# EAGLE board ranback_top (EAGLE 9.6.2)
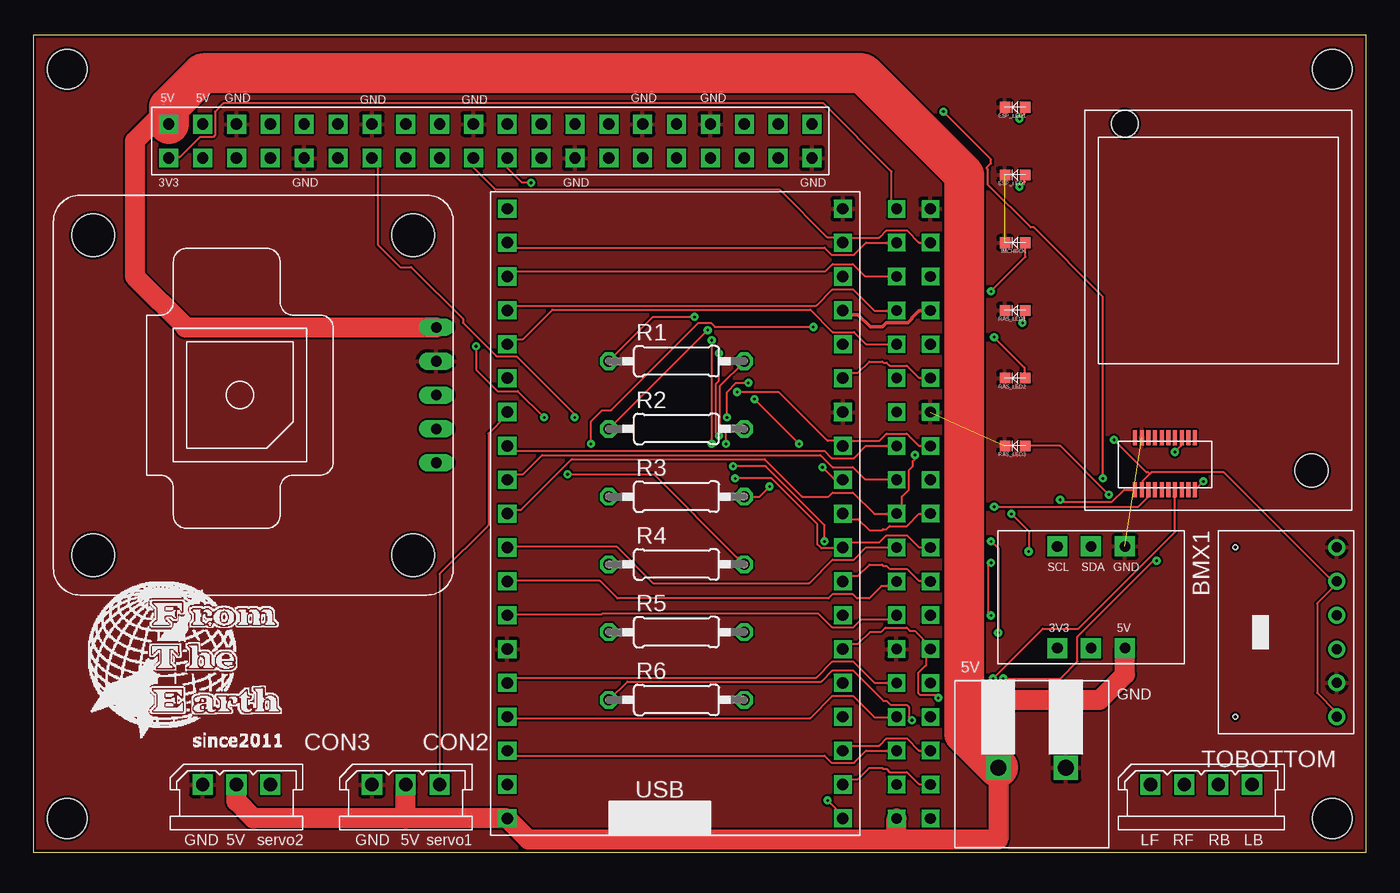
[diagram p0: board, top side]
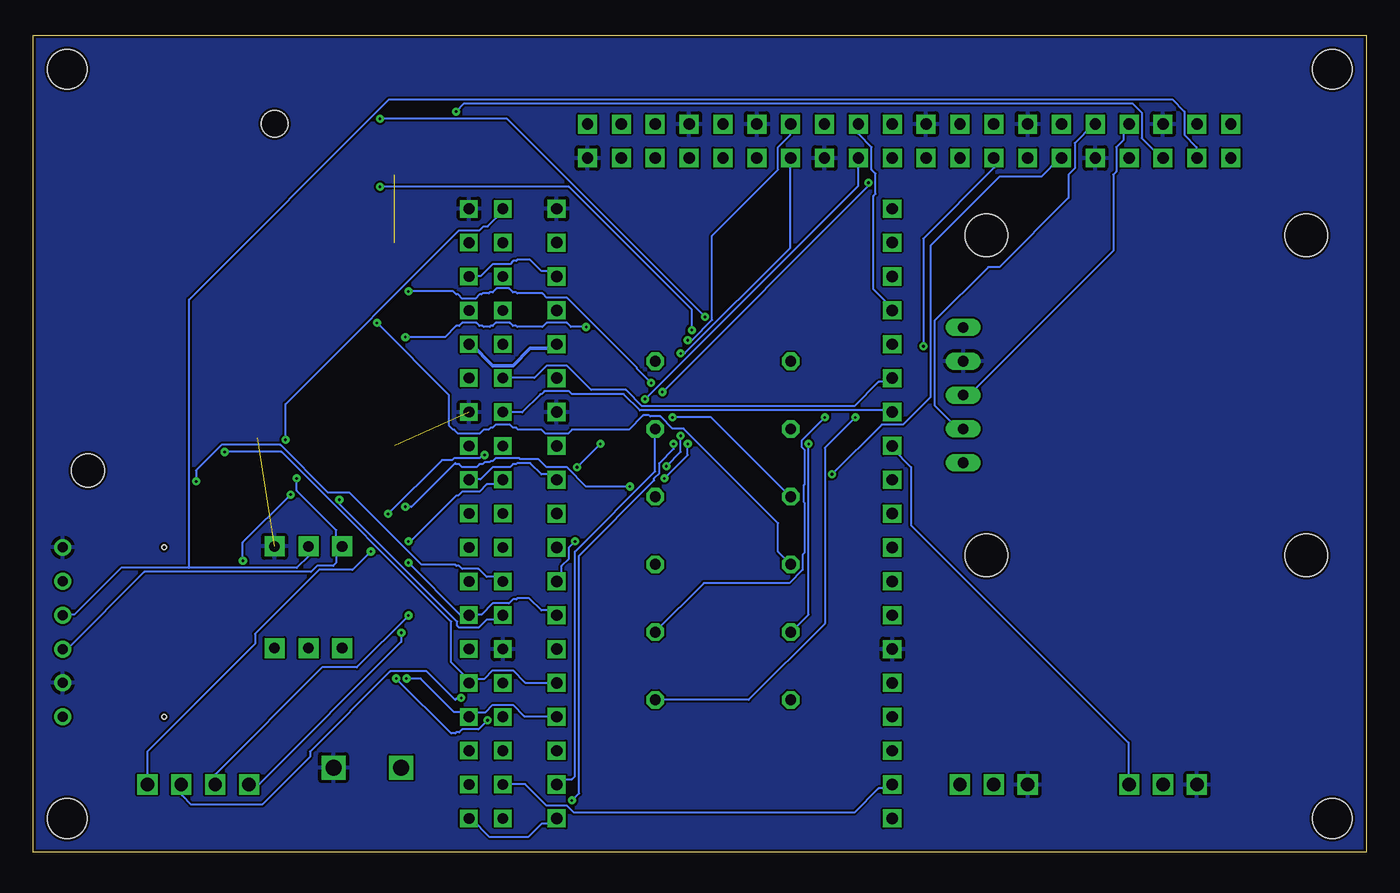
[diagram p1: board, bottom side, seen from below]

Size 100 x 61.27 mm. Coordinates in mm from the lower left corner, seen from the top.
Outline: 0,0 100,0 100,61.27 0,61.27 0,0
Copper layers (1*16): Top 0.035mm / dielectric 1.5mm / Bottom 0.035mm
Design rules "PCBGoGo": minimum track width 6mil, minimum drill 0.2mm, track to track 6mil, track to pad 6mil, pad to pad 6mil, via to via 6mil, smd to smd 6mil, copper to edge 0.2mm, drill to drill 6mil, minimum pad ring 10mil, minimum via ring 8mil, stop-mask expansion 4mil, vias tented up to drill 0mil, thermal gap 10mil
Net classes: 1 esp: width 0.254 mm, drill 0.127 mm, clearance 0.025 mm; 2 GND_+12V: width 0.305 mm
Holes 3 mm at 2.54,2.54 2.54,58.73 97.46,58.73 97.46,2.54

## Footprints (pad centres in the part's own frame; a part is rotated, then mirrored left to right if it is on the bottom)
BMX055 = drill 0.8 pad 1.5 square: 3V3 8.81,-9.53; GND 1.19,-4.46; SCL 1.19,-9.53; SDA 1.19,-7; VCC 8.81,-4.46; VCCIO 8.81,-7
2.5_MINI-SPOX_3PIN = drill 1 square: 1 -1.27,0; 2 1.27,0; 3 3.81,0
OSXX1608C1A = smd 0.8 x 0.8: AN -0.75,0; CT 0.75,0
AE-GYSFDMAXB = drill 0.8 long: P1 13.716,5.08; P2 13.716,2.54; P3 13.716,0; P4 13.716,-2.54; P5 13.716,-5.08 | hole 3.2: -12,12; 12,12; 12,-12; -12,-12
IM920C = smd 0.3 x 1.1: $P1 -1.75,-13.45; $P2 -1.75,-9.55; $P3 -2.25,-13.45; $P4 -2.25,-9.55; $P5 -2.75,-13.45; $P6 -2.75,-9.55; $P7 -3.25,-13.45; $P8 -3.25,-9.55; $P9 -3.75,-13.45; $P10 -3.75,-9.55; $P11 -4.25,-13.45; $P12 -4.25,-9.55; $P13 -4.75,-13.45; $P14 -4.75,-9.55; $P15 -5.25,-13.45; $P16 -5.25,-9.55; $P17 -5.75,-13.45; $P18 -5.75,-9.55; $P19 -6.25,-13.45; $P20 -6.25,-9.55 | hole 2.5: 7,-12 | hole 2: -7,14
19_2.54 = drill 0.8 pad 1.27 square: 1 0,12.7; 2 0,10.16; 3 0,7.62; 4 0,5.08; 5 0,2.54; 6 0,0; 7 0,-2.54; 8 0,-5.08; 9 0,-7.62; 10 0,-10.16; 11 0,-12.7; 12 0,-15.24; 13 0,-17.78; 14 0,-20.32; 15 0,-22.86; 16 0,-25.4; 17 0,-27.94; 18 0,-30.48; 19 0,-33.02
0207/10 = drill 0.813 octagon: 1 -5.08,0; 2 5.08,0
RASPBERRYPI4B = drill 0.85 pad 1.422 square: 3V3_1 -2.54,-2.54; 3V3_2 -2.54,-22.86; 5V_1 0,-2.54; 5V_2 0,-5.08; GND_1 0,-7.62; GND_2 0,-17.78; GND_3 0,-25.4; GND_4 0,-38.1; GND_5 0,-43.18; GND_6 -2.54,-12.7; GND_7 -2.54,-33.02; GND_8 -2.54,-50.8; GPIO0 -2.54,-35.56; GPIO1 0,-35.56; GPIO2 -2.54,-5.08; GPIO3 -2.54,-7.62; GPIO4 -2.54,-10.16; GPIO5 -2.54,-38.1; GPIO6 -2.54,-40.64; GPIO7 0,-33.02; GPIO8 0,-30.48; GPIO9 -2.54,-27.94; GPIO10 -2.54,-25.4; GPIO11 -2.54,-30.48; GPIO12 0,-40.64; GPIO13 -2.54,-43.18; GPIO14 0,-10.16; GPIO15 0,-12.7; GPIO16 0,-45.72; GPIO17 -2.54,-15.24; GPIO18 0,-15.24; GPIO19 -2.54,-45.72; GPIO20 0,-48.26; GPIO21 0,-50.8; GPIO22 -2.54,-20.32; GPIO23 0,-20.32; GPIO24 0,-22.86; GPIO25 0,-27.94; GPIO26 -2.54,-48.26; GPIO27 -2.54,-17.78
TERMINAL_SLOPED_2PIN = drill 1.2 square: 1 -2.54,0; 2 2.54,0
2.5_MINI-SPOX_4PIN = drill 1 square: P$1 -1.27,0; P$2 6.35,0; P$3 1.27,0; P$4 3.81,0
ESP32 = drill 0.85 square: 3.3V 1.27,46.99; 5V 1.27,1.27; EN 1.27,44.45; GND1 1.27,13.97; GND2 26.44,46.99; GND3 26.44,31.75; GPIO0 26.44,13.97; GPIO2 26.44,11.43; GPIO4 26.44,16.51; GPIO5 26.44,24.13; GPIO6 26.44,1.27; GPIO7 26.44,3.81; GPIO8 26.44,6.35; GPIO9 1.27,8.89; GPIO10 1.27,6.35; GPIO11 1.27,3.81; GPIO12 1.27,16.51; GPIO13 1.27,11.43; GPIO14 1.27,19.05; GPIO15 26.44,8.89; GPIO16 26.44,19.05; GPIO17 26.44,21.59; GPIO18 26.44,26.67; GPIO19 26.44,29.21; GPIO21 26.44,34.29; GPIO22 26.44,41.91; GPIO23 26.44,44.45; GPIO25 1.27,26.67; GPIO26 1.27,24.13; GPIO27 1.27,21.59; GPIO32 1.27,31.75; GPIO33 1.27,29.21; GPIO34 1.27,36.83; GPIO35 1.27,34.29; GPIO36 1.27,41.91; GPIO39 1.27,39.37; RX 26.44,36.83; TX 26.44,39.37
GY-BMP280-FOOTPRINT = drill 0.75 pad 1.27: CSB 11.43,0; GND 3.81,0; SCK 6.35,0; SDI 8.89,0; SDO 13.97,0; VCC 1.27,0 | hole 0.35: 1.27,7.62; 13.97,7.62

## Placement (x,y rotation side)
BMX1  BMX055  [BMX055]  86.36,24.13 270 top
CON2  [2.5_MINI-SPOX_3PIN]  26.67,5.08 0 top
CON3  [2.5_MINI-SPOX_3PIN]  13.97,5.08 0 top
ESP_LED1  OSXX1608C1A  [OSXX1608C1A]  73.66,55.88 180 top
ESP_LED2  OSXX1608C1A  [OSXX1608C1A]  73.66,50.8 180 top
GPS  AE-GYSFDMAXB  [AE-GYSFDMAXB]  16.51,34.29 0 top
IM  IM920C  [IM920C]  88.9,40.64 0 top
IMCHECK  OSXX1608C1A  [OSXX1608C1A]  73.66,45.72 180 top
PIN_L  [19_2.54]  64.77,35.56 0 top
PIN_R  [19_2.54]  67.31,35.56 0 top
R1  80R  [0207/10]  48.26,36.83 0 top
R2  80R  [0207/10]  48.26,31.75 0 top
R3  80R  [0207/10]  48.26,26.67 0 top
R4  80R  [0207/10]  48.26,21.59 0 top
R5  80R  [0207/10]  48.26,16.51 0 top
R6  80R  [0207/10]  48.26,11.43 0 top
RAS_LED1  OSXX1608C1A  [OSXX1608C1A]  73.66,40.64 180 top
RAS_LED2  OSXX1608C1A  [OSXX1608C1A]  73.66,35.56 180 top
RAS_LED3  OSXX1608C1A  [OSXX1608C1A]  73.66,30.48 180 top
RASPBERRYPI_4B  [RASPBERRYPI4B]  7.62,54.61 90 top
TM5  [TERMINAL_SLOPED_2PIN]  74.93,6.35 0 top
TOBOTTOM  [2.5_MINI-SPOX_4PIN]  85.09,5.08 0 top
U$1  [LOGO]  3.56,6.48 0 top
U$2  ESP32  [ESP32]  34.29,1.27 0 top
U$9  GY-BPM280  [GY-BMP280-FOOTPRINT]  97.79,8.89 90 top

## Library data of the parts
BMX1 = BMX055
CON2 CON3 TOBOTTOM = Connector
ESP_LED1 ESP_LED2 IMCHECK RAS_LED1-RAS_LED3 = ChipLED
GPS = AE-GYSFDMAXB
IM = IM920
PIN_L PIN_R = JumperPins
R1-R6 = rcl; SPICEPREFIX: R
RASPBERRYPI_4B = RASPBERRYPI4B
TM5 = TerminalBrock
U$1 = logo
U$2 = ESP32_dev
U$9 = BMP280

## Nets
3V3: BMX1.3V3
+3V3: IM.$P17 PIN_L.1 RASPBERRYPI_4B.3V3_1 U$9.CSB U$9.VCC
+5V: BMX1.VCC CON2.2 CON3.2 GPS.P1 PIN_L.19 RASPBERRYPI_4B.5V_1 TM5.1 U$2.5V
BB_SCL: BMX1.SCL RASPBERRYPI_4B.GPIO3 U$9.SCK
BB_SDA: BMX1.SDA RASPBERRYPI_4B.GPIO2 U$9.SDI
EN: PIN_L.2 U$2.EN
GND [GND_+12V]: BMX1.GND CON2.1 CON3.1 ESP_LED1.CT ESP_LED2.CT GPS.P2 IM.$P18 IMCHECK.CT PIN_L.14 PIN_R.1 PIN_R.7 RAS_LED1.CT RAS_LED2.CT RAS_LED3.CT RASPBERRYPI_4B.GND_1 RASPBERRYPI_4B.GND_2 RASPBERRYPI_4B.GND_3 RASPBERRYPI_4B.GND_4 RASPBERRYPI_4B.GND_5 RASPBERRYPI_4B.GND_6 RASPBERRYPI_4B.GND_7 RASPBERRYPI_4B.GND_8 TM5.2 U$2.GND1 U$2.GND2 U$2.GND3 U$9.GND U$9.SDO
GPS_RX: GPS.P3 RASPBERRYPI_4B.GPIO14
GPS_TX: GPS.P4 RASPBERRYPI_4B.GPIO15
IM_BUSY: IM.$P1 PIN_L.12 U$2.GPIO14
IM_RESET: IM.$P19 PIN_L.13 U$2.GPIO12
IM_RX: IM.$P6 PIN_R.15 U$2.GPIO2
IM_TX: IM.$P7 PIN_R.16 U$2.GPIO15
IO5: PIN_R.10 U$2.GPIO5
IO8: PIN_R.17 U$2.GPIO8
IO9: PIN_L.16 U$2.GPIO9
IO10: PIN_L.17 U$2.GPIO10
IO11: PIN_L.18 U$2.GPIO11
IO13: PIN_L.15 U$2.GPIO13
IO27: PIN_L.11 U$2.GPIO27
IO34: PIN_L.5 U$2.GPIO34
IO35: PIN_L.6 U$2.GPIO35
LED1: PIN_R.19 R1.2 U$2.GPIO6
LED2: PIN_R.18 R2.2 U$2.GPIO7
LED3: IM.$P15 R3.2
LED4: R4.2 RASPBERRYPI_4B.GPIO17
LED5: R5.2 RASPBERRYPI_4B.GPIO27
LED6: R6.2 RASPBERRYPI_4B.GPIO22
MD_LB: PIN_L.10 TOBOTTOM.P$2 U$2.GPIO26
MD_LF: PIN_L.9 TOBOTTOM.P$1 U$2.GPIO25
MD_RB: PIN_R.14 TOBOTTOM.P$4 U$2.GPIO0
MD_RF: PIN_R.13 TOBOTTOM.P$3 U$2.GPIO4
N$1: ESP_LED1.AN R1.1
N$2: ESP_LED2.AN R2.1
N$3: IMCHECK.AN R3.1
N$4: R4.1 RAS_LED1.AN
N$5: R5.1 RAS_LED2.AN
N$6: R6.1 RAS_LED3.AN
RP_MISO: PIN_R.8 RASPBERRYPI_4B.GPIO9 U$2.GPIO19
RP_MOSI: PIN_R.2 RASPBERRYPI_4B.GPIO10 U$2.GPIO23
RP_RX: PIN_R.11 RASPBERRYPI_4B.GPIO1 U$2.GPIO17
RP_SCK: PIN_R.9 RASPBERRYPI_4B.GPIO11 U$2.GPIO18
RP_SS: PIN_L.4 RASPBERRYPI_4B.GPIO8 U$2.GPIO39
RP_TX: PIN_R.12 RASPBERRYPI_4B.GPIO0 U$2.GPIO16
RXD [esp]: PIN_R.4 U$2.TX
SCL: PIN_R.3 U$2.GPIO22
SDA: PIN_R.6 U$2.GPIO21
SENSOR_VP: PIN_L.3 U$2.GPIO36
SERVO1: CON2.3 PIN_L.7 U$2.GPIO32
SERVO2: CON3.3 PIN_L.8 U$2.GPIO33
TXD [esp]: PIN_R.5 U$2.RX
VCCIO: BMX1.VCCIO

## Tracks (layer width: path | path; a pad name or v marks a point on that pad's centre or on a via)
+3V3  (via drill 0.2)
  Top 0.152: 83.78,28.38 83.9,28.5 89.31,28.5 97.46,20.34 | 83.78,28.38 83.21,27.81 83.21,27.2 IM.$P17 | 97.46,20.34 97.77,20.34 U$9.CSB 97.46,20.34 | 97.46,20.34 97.46,19.81 96.32,18.67 96.32,11.96 97.77,10.52 97.77,10.21 U$9.VCC | v81.08,30.94 83.52,28.5 83.67,28.5 83.78,28.38 | RASPBERRYPI_4B.3V3_1 10.21,52.12 10.97,52.12 12.5,53.65 13.49,53.65 13.64,53.8 13.64,55.55 14.25,56.16 59.28,56.16 64.39,51.05 64.39,48.69 64.77,48.31 PIN_L.1
  Bottom 0.152: PIN_L.1 64.77,48.08 65.91,46.94 66.22,46.94 66.52,46.63 68.05,46.63 81.08,33.6 v81.08,30.94
+5V
  Top 1.5: 10.16,55.88 7.62,53.34 7.62,43.18 11.43,39.37 GPS.P1 | BMX1.VCC 81.9,13.32 80.01,11.43 72.39,11.43 TM5.1 72.39,0.95 64.77,0.95 | 64.77,0.95 37.15,0.95 U$2.5V 27.94,2.54 | CON3.2 15.24,3.81 16.51,2.54 27.94,2.54 | 27.94,2.54 CON2.2 | 64.77,0.95 PIN_L.19
  Top 3: TM5.1 69.85,8.89 69.85,50.8 62.23,58.42 12.7,58.42 10.16,55.88 RASPBERRYPI_4B.5V_1
BB_SCL  (via drill 0.2)
  Top 0.152: v68.28,55.55 71.86,51.97 71.86,51.66 71.55,51.36 71.55,51.28 71.63,51.21 71.63,50.06 74.83,46.86 75.06,46.86 80.24,41.68 v80.24,28.04
  Bottom 0.152: U$9.SCK 97.46,15.24 91.67,21.03 79.17,21.03 78.72,21.49 77.5,21.49 77.27,21.72 77.27,22.55 76.89,22.94 BMX1.SCL 76.89,23.01 77.27,23.39 77.27,24.16 80.24,27.13 v80.24,28.04 | v68.28,55.55 67.67,56.16 17.53,56.16 16.84,55.47 16.84,53.57 15.39,52.12 15.24,52.12 RASPBERRYPI_4B.GPIO3
BB_SDA
  Bottom 0.152: 88.32,21.34 80.24,21.34 79.32,22.25 79.32,22.94 BMX1.SDA | 88.32,21.34 93.42,21.34 96.93,17.83 97.77,17.83 U$9.SDI | 88.32,21.34 88.32,41.45 73.3,56.46 14.55,56.46 13.64,55.55 13.64,53.8 12.72,52.88 12.72,52.12 RASPBERRYPI_4B.GPIO2
EN
  Top 0.152: PIN_L.2 62.48,45.72 61.57,44.81 59.89,44.81 59.36,45.34 35.97,45.34 35.59,45.72 U$2.EN
GND  (3 unrouted)
  pour Top: -1.27,62.23 101.6,62.23 101.6,-2.54 -1.27,-2.54
  pour Bottom: -1.27,62.23 101.6,62.23 101.6,-1.27 -1.27,-1.27
GPS_RX
  Bottom 0.152: GPS.P3 29.79,34.29 18.97,45.11 18.97,50.83 18.75,51.05 18.75,52.88 18.21,53.42 18.21,54.18 RASPBERRYPI_4B.GPIO14
GPS_TX
  Bottom 0.152: GPS.P4 30.25,31.77 30.63,31.77 32.38,33.53 32.38,39.85 28.35,43.89 27.51,43.89 22.33,49.07 22.33,50.83 21.87,51.28 21.87,53.19 20.5,54.56 20.34,54.56 RASPBERRYPI_4B.GPIO15
IM_BUSY  (via drill 0.2)
  Top 0.152: v87.78,27.81 87.17,27.2 IM.$P1 | U$2.GPIO14 35.59,20.34 42.52,20.34 43.81,19.05 59.66,19.05 59.97,19.36 61.49,19.36 61.8,19.05 62.71,19.05 63.63,19.96 64.47,19.96 64.77,20.27 PIN_L.12
  Bottom 0.152: v87.78,27.81 87.78,28.65 85.88,30.56 81.46,30.56 77.88,26.98 76.28,26.98 70.87,21.57 68.35,21.57 68.28,21.49 68.05,21.49 67.82,21.26 66.6,21.26 65.99,20.65 65.08,20.65 64.77,20.34 PIN_L.12
IM_RESET  (via drill 0.2)
  Top 0.152: v77.04,26.44 77.19,26.29 80.92,26.29 81.84,27.2 82.6,27.2 IM.$P19 | U$2.GPIO12 35.59,17.83 42.6,17.83 42.67,17.91 58.9,17.91 59.97,16.84 61.49,16.84 62.1,17.45 64.47,17.45 64.77,17.75 PIN_L.13
  Bottom 0.152: v77.04,26.44 77.04,26.14 68.2,17.3 68.2,16.99 68.05,16.84 66.6,16.84 65.99,17.45 65.08,17.45 64.77,17.75 PIN_L.13
IM_RX  (via drill 0.2)
  Top 0.152: v85.65,30.02 86.11,30.48 86.11,31.09 IM.$P6
  Bottom 0.152: v85.65,30.02 81.38,30.02 68.66,17.3 68.66,14.25 67.36,12.95 67.36,12.72 PIN_R.15 67.36,13.03 66.14,13.03 65.53,13.64 64.01,13.64 63.09,12.72 60.73,12.72 U$2.GPIO2
IM_TX  (via drill 0.2)
  Top 0.152: v72.01,13.03 75.74,16.76 78.41,16.76 85.65,24 85.65,27.13 IM.$P7
  Bottom 0.152: v72.01,13.03 70.94,13.03 68.43,10.52 67.67,10.52 PIN_R.16 67.28,10.21 66.98,10.52 66.06,10.52 65.53,11.05 64.01,11.05 63.17,10.21 60.73,10.21 U$2.GPIO15
IO5
  Top 0.152: PIN_R.10 67.28,25.38 66.45,25.38 65.53,24.46 64.24,24.46 64.01,24.23 63.78,24.23 63.7,24.16 62.71,24.16 61.87,24.99 61.11,24.99 60.73,25.38 U$2.GPIO5
IO8
  Top 0.152: PIN_R.17 66.45,7.62 65.53,8.53 64.01,8.53 63.48,8 61.11,8 U$2.GPIO8
IO9
  Top 0.152: U$2.GPIO9 35.66,10.06 58.29,10.06 59.97,11.73 61.49,11.73 63.09,10.13 64.77,10.13 PIN_L.16
IO10
  Top 0.152: PIN_L.17 62.48,7.62 61.57,6.71 59.89,6.71 59.36,7.24 35.97,7.24 35.59,7.62 U$2.GPIO10
IO11
  Bottom 0.152: PIN_L.18 64.77,5.11 63.09,5.11 61.49,3.5 59.97,3.5 59.44,2.97 38.41,2.97 36.58,4.8 35.81,4.8 35.59,5.03 U$2.GPIO11
IO13
  Top 0.152: U$2.GPIO13 35.97,13.11 58.75,13.11 59.97,14.33 61.49,14.33 63.09,12.72 64.77,12.72 PIN_L.15
IO27
  Top 0.152: PIN_L.11 62.48,22.86 61.57,21.95 59.97,21.95 58.22,20.19 46.48,20.19 43.74,22.94 35.66,22.94 35.59,22.86 U$2.GPIO27
IO34
  Top 0.152: PIN_L.5 62.48,38.1 61.57,39.01 59.97,39.01 58.29,40.69 38.94,40.69 36.73,38.48 35.97,38.48 35.59,38.1 U$2.GPIO34
IO35
  Bottom 0.152: PIN_L.6 64.77,35.59 62.41,35.59 61.49,36.5 59.97,36.5 58.14,34.67 55.55,34.67 54.33,33.45 38.41,33.45 36.58,35.28 35.81,35.28 35.59,35.51 U$2.GPIO35
LED1  (via drill 0.2)
  Top 0.152: v51.97,30.63 51.97,31.47 51.51,31.93 51.51,34.98 53.34,36.8 R1.2 | v59.59,3.89 60.66,2.82 60.66,2.59 U$2.GPIO6
  Bottom 0.152: PIN_R.19 67.28,2.52 67.13,2.52 65.76,1.14 62.87,1.14 61.87,2.13 61.11,2.13 60.73,2.52 U$2.GPIO6 | v51.97,30.63 51.97,30.25 53.03,29.18 53.03,28.42 53.42,28.04 53.42,27.89 59.05,22.25 59.05,4.42 v59.59,3.89
LED2
  Top 0.152: PIN_R.18 67.28,5.11 66.45,5.11 65.53,6.02 64.24,6.02 64.01,6.25 63.78,6.25 63.7,6.33 62.71,6.33 61.87,5.49 61.11,5.49 60.73,5.11 U$2.GPIO7
  Bottom 0.152: R2.2 53.34,28.57 59.36,22.55 59.36,5.71 59.59,5.49 60.27,5.49 60.66,5.11 U$2.GPIO7
LED3  (via drill 0.2)
  Top 0.152: v72.08,25.91 82.91,25.91 83.59,26.59 83.59,27.13 IM.$P15 | v55.24,27.43 54.48,26.67 R3.2
  Bottom 0.152: v72.08,25.91 71.63,25.91 68.35,29.18 68.28,29.11 68.05,29.11 67.82,28.88 66.75,28.88 66.52,29.11 66.29,29.11 66.14,29.26 65.76,29.26 65.68,29.34 65.53,29.34 65.3,29.57 63.55,29.57 63.48,29.49 62.1,29.49 61.49,28.88 59.97,28.88 58.52,27.43 v55.24,27.43
LED4  (via drill 0.2)
  Top 0.152: v40.08,28.35 46.56,28.35 52.81,22.1 52.88,22.1 53.34,21.64 R4.2
  Bottom 0.152: v40.08,28.35 36.35,32.08 34.75,32.08 32.69,34.14 32.69,45.49 27.51,50.67 24.38,50.67 23.01,52.05 22.86,52.05 RASPBERRYPI_4B.GPIO17
LED5  (via drill 0.2)
  Top 0.152: v40.62,32.61 40.62,32.84 36.27,37.19 34.75,37.19 32.23,39.7 32.23,40.01 28.35,43.89 27.51,43.89 25.83,45.57 25.83,51.66 25.45,52.05 RASPBERRYPI_4B.GPIO27
  Bottom 0.152: v40.62,32.61 42.37,30.86 42.37,30.4 42.14,30.18 42.14,27.58 42.22,27.51 42.22,26.29 42.14,26.21 42.14,22.48 42.29,22.33 42.29,21.18 43.28,20.19 49.68,20.19 53.34,16.54 R5.2
LED6  (via drill 0.2)
  Top 0.152: v38.33,32.61 36.35,34.59 34.82,34.59 33.22,36.2 v33.22,37.95
  Bottom 0.152: R6.2 46.33,11.43 40.62,17.14 40.62,30.33 v38.33,32.61 | v33.22,37.95 33.22,46.02 27.89,51.36 27.89,52.05 RASPBERRYPI_4B.GPIO22
MD_LB  (via drill 0.2)
  Top 0.152: U$2.GPIO26 35.59,25.45 35.81,25.68 36.58,25.68 40.39,29.49 54.86,29.49 57.68,26.67 59.66,26.67 59.97,26.98 61.49,26.98 63.09,25.38 64.77,25.38 PIN_L.10 64.77,25.45 65.15,25.83 65.15,26.67 65.68,27.2 65.68,28.65 65.99,28.96 65.99,29.34 66.14,29.49 v66.14,29.79 | v74.68,22.55 74.68,24.08 v73.38,25.38
  Bottom 0.152: TOBOTTOM.P$2 91.44,7.54 83.36,15.62 83.36,16.38 78.56,21.18 76.05,21.18 v74.68,22.55 | v73.38,25.38 69.34,29.41 68.58,29.41 68.43,29.57 66.52,29.57 66.29,29.79 v66.14,29.79
MD_LF  (via drill 0.2)
  Top 0.152: U$2.GPIO25 35.97,28.35 36.73,28.35 38.18,29.79 59.05,29.79 59.97,28.88 61.49,28.88 62.41,27.96 64.77,27.96 PIN_L.9 | v72.39,16.46 72.39,22.78 v71.86,23.32
  Bottom 0.152: v72.39,16.46 72.39,15.77 83.06,5.11 83.82,5.11 TOBOTTOM.P$1 | v71.86,23.32 71.7,23.32 68.28,26.75 68.12,26.75 67.82,27.05 66.52,27.05 65.99,27.58 65.08,27.58 64.77,27.89 PIN_L.9
MD_RB  (via drill 0.2)
  Top 0.152: 67.28,15.24 67.28,15.47 66.14,16.61 65.76,16.61 65.53,16.84 63.93,16.84 63.63,16.54 62.79,16.54 61.87,15.62 61.11,15.62 U$2.GPIO0 | v67.89,11.58 67.67,11.81 66.52,11.81 66.37,11.96 66.37,13.41 66.98,14.02 66.98,14.94 67.28,15.24 | 67.28,15.24 PIN_R.14
  Bottom 0.152: v67.89,11.58 67.97,11.51 68.28,11.51 68.35,11.43 70.48,13.56 73.23,13.56 79.25,7.54 79.25,7.16 82.83,3.58 88.16,3.58 88.85,4.27 88.85,5.03 TOBOTTOM.P$4
MD_RF  (via drill 0.2)
  Top 0.152: v71.86,17.75 71.63,17.98 71.63,21.49 v71.86,21.72
  Bottom 0.152: U$2.GPIO4 60.73,17.83 61.04,18.14 61.87,18.14 62.79,19.05 63.7,19.05 63.78,18.97 64.01,18.97 64.31,18.67 65.53,18.67 66.37,17.83 67.28,17.83 PIN_R.13 67.36,17.75 67.89,17.75 v71.86,21.72 | v71.86,17.75 75.74,13.87 78.33,13.87 86.33,5.87 86.33,5.11 TOBOTTOM.P$3
N$1  (via drill 0.2)
  Top 0.152: v73.99,55.02 74.37,55.4 74.37,55.85 ESP_LED1.AN | v49.61,40.16 46.48,40.16 43.2,36.88 R1.1
  Bottom 0.152: v73.99,55.02 64.47,55.02 v49.61,40.16
N$2  (via drill 0.2)
  Top 0.152: v73.99,49.91 74.37,50.29 74.37,50.75 ESP_LED2.AN | R2.1 v50.6,39.17
  Bottom 0.152: v73.99,49.91 59.82,49.91 50.6,40.69 v50.6,39.17
N$3  (via drill 0.2)
  Top 0.152: v71.86,42.06 74.45,44.65 74.45,45.72 IMCHECK.AN | v53.65,35.2 52.73,35.2 52.05,34.52 v52.05,32.61
  Bottom 0.152: v71.86,42.06 68.5,42.06 68.28,41.83 68.12,41.83 67.82,41.53 66.83,41.53 66.52,41.83 66.37,41.83 66.29,41.91 65.84,41.91 65.76,41.99 65.53,41.99 65.23,42.29 64.31,42.29 64.01,41.99 63.78,41.99 63.7,41.91 61.8,41.91 61.49,41.6 59.97,41.6 54.71,36.35 54.71,36.27 v53.65,35.2 | v52.05,32.61 49.15,32.61 43.2,26.67 R3.1
N$4  (via drill 0.2)
  Top 0.152: v74.22,39.7 74.37,39.85 74.37,40.62 RAS_LED1.AN
  Bottom 0.152: v74.22,39.7 68.81,34.29 68.81,32 68.5,31.7 68.43,31.7 68.12,31.39 66.52,31.39 66.22,31.7 65.84,31.7 65.68,31.85 65.53,31.85 65.3,32.08 64.24,32.08 64.01,31.85 63.78,31.85 63.63,31.7 61.87,31.7 61.57,31.39 59.89,31.39 59.59,31.7 55.32,31.7 54.25,32.77 53.8,32.77 53.72,32.69 52.96,32.69 52.05,31.77 51.21,31.77 44.12,24.69 44.12,22.55 43.2,21.64 R4.1
N$5  (via drill 0.2)
  Top 0.152: v72.08,38.63 74.37,36.35 74.37,35.59 RAS_LED2.AN | v58.52,39.4 51.13,39.4 50.83,39.7 49.91,39.7 43.36,33.15 42.67,33.15 41.83,32.31 v41.83,30.63
  Bottom 0.152: v72.08,38.63 69.11,38.63 68.28,39.47 68.05,39.47 67.82,39.7 66.75,39.7 66.52,39.47 66.29,39.47 66.22,39.4 65.76,39.4 65.68,39.47 65.53,39.47 65.3,39.7 64.24,39.7 64.01,39.47 63.78,39.47 63.7,39.4 61.8,39.4 61.49,39.7 59.97,39.7 59.66,39.4 v58.52,39.4 | v41.83,30.63 41.83,17.83 43.13,16.54 R5.1
N$6  (via drill 0.2)
  Top 0.152: RAS_LED3.AN 77.04,30.48 v80.7,26.82 | v84.28,21.87 84.05,21.87 78.33,16.15 78.33,14.33 77.04,13.03 v72.77,13.03 | v65.91,9.91 65.68,10.13 65.68,10.9 65.53,11.05 64.31,11.05 64.01,11.35 63.78,11.35 61.49,13.64 59.97,13.64 59.13,12.8 44.58,12.8 43.2,11.43 R6.1
  Bottom 0.152: v80.7,26.82 84.28,23.24 v84.28,21.87 | v72.77,13.03 68.66,8.91 68.35,8.91 68.28,8.99 68.05,8.99 67.82,9.22 66.6,9.22 v65.91,9.91
RP_MISO  (via drill 0.2)
  Top 0.152: PIN_R.8 66.45,30.48 65.53,31.39 64.01,31.39 63.48,30.86 61.11,30.86 U$2.GPIO19 60.66,30.48 60.27,30.86 59.59,30.86 55.93,34.52 v52.81,34.52 | v37.34,50.22 36.65,50.22 35.59,51.28 35.59,52.05 RASPBERRYPI_4B.GPIO9
  Bottom 0.152: v37.34,50.22 37.34,49.99 v52.81,34.52
RP_MOSI
  Top 0.152: PIN_R.2 66.45,45.72 65.53,46.63 64.01,46.63 63.48,46.1 61.11,46.1 U$2.GPIO23 60.66,45.72 60.27,46.1 59.59,46.1 56.01,49.68 34.67,49.68 33.07,51.28 33.07,52.05 RASPBERRYPI_4B.GPIO10
RP_RX  (via drill 0.2)
  Top 0.152: PIN_R.11 66.45,22.86 65.53,23.77 64.01,23.77 63.48,23.24 61.11,23.24 U$2.GPIO17 60.66,22.86 60.58,22.78 59.13,22.78 58.83,23.09 58.83,24.61 55.4,28.04 v52.65,28.04 | v50.9,30.63 v50.9,38.41
  Bottom 0.152: v50.9,38.41 50.6,38.41 49.07,39.93 49.07,46.25 44.12,51.21 44.12,52.88 43.2,53.8 43.2,54.56 RASPBERRYPI_4B.GPIO1 | v50.9,30.63 50.9,29.79 v52.65,28.04
RP_SCK  (via drill 0.2)
  Top 0.152: v57.45,30.63 v54.1,33.98 | v59.21,28.88 60.12,27.96 60.66,27.96 U$2.GPIO18
  Bottom 0.152: PIN_R.9 67.28,27.96 66.45,27.96 65.53,28.88 64.24,28.88 64.01,29.11 63.78,29.11 63.7,29.18 62.71,29.18 61.87,28.35 61.11,28.35 60.73,27.96 U$2.GPIO18 | RASPBERRYPI_4B.GPIO11 38.1,49.99 v54.1,33.98 | v59.21,28.88 v57.45,30.63
RP_SS
  Top 0.152: PIN_L.4 64.77,40.62 63.09,40.62 61.49,42.22 59.97,42.22 58.75,41 35.89,41 35.59,40.69 U$2.GPIO39
  Bottom 0.152: RASPBERRYPI_4B.GPIO8 38.1,53.87 37.11,52.88 37.11,51.21 36.8,50.9 36.8,49.38 36.96,49.23 36.96,42.22 35.59,40.84 35.59,40.69 U$2.GPIO39
RP_TX  (via drill 0.2)
  Top 0.152: PIN_R.12 67.28,20.34 66.45,20.34 65.53,21.26 64.24,21.26 64.01,21.49 63.78,21.49 63.7,21.57 62.71,21.57 61.87,20.73 61.11,20.73 60.73,20.34 U$2.GPIO16 | v51.44,37.41 51.44,35.36 51.21,35.13 51.21,31.47 v51.44,31.24 | v52.5,28.96 54.94,28.96 59.36,24.54 v59.36,23.32
  Bottom 0.152: v51.44,37.41 51.13,37.41 43.2,45.34 43.2,52.05 RASPBERRYPI_4B.GPIO0 | v51.44,31.24 51.44,30.02 v52.5,28.96 | v59.36,23.32 59.82,22.86 59.82,22.02 60.35,21.49 60.35,20.65 60.66,20.34 U$2.GPIO16
RXD
  Top 0.254: PIN_R.4 67.28,40.62 66.45,40.62 65.91,40.08 65.91,40.01 65.61,39.7 64.01,39.7 63.7,39.4 62.79,39.4 61.87,40.31 61.04,40.31 60.73,40.62 U$2.TX
SCL
  Bottom 0.152: PIN_R.3 67.28,43.2 66.45,43.2 65.53,44.12 64.24,44.12 64.01,44.35 63.78,44.35 63.7,44.42 62.71,44.42 61.87,43.59 61.11,43.59 60.73,43.2 U$2.GPIO22
SDA
  Top 0.152: PIN_R.6 67.28,35.59 66.45,35.59 65.53,36.5 64.24,36.5 64.01,36.73 63.78,36.73 63.7,36.8 62.71,36.8 61.87,35.97 61.11,35.97 60.73,35.59 U$2.GPIO21
SENSOR_VP
  Top 0.152: U$2.GPIO36 35.97,43.59 59.44,43.59 59.97,44.12 61.49,44.12 62.41,43.2 64.77,43.2 PIN_L.3
SERVO1
  Top 0.152: CON2.3 30.48,20.88 34.14,24.54 34.14,31.39 35.51,32.77 35.51,32.99 U$2.GPIO32
  Bottom 0.152: PIN_L.7 64.77,32.99 63.32,32.99 61.95,34.37 61.87,34.37 61.65,34.59 59.82,34.59 59.59,34.37 55.7,34.37 54.48,33.15 35.66,33.15 35.59,33.07 U$2.GPIO32
SERVO2
  Top 0.152: PIN_L.8 62.48,30.48 61.57,29.57 59.89,29.57 59.36,30.1 35.97,30.1 35.59,30.48 U$2.GPIO33
  Bottom 0.152: CON3.3 17.83,5.11 17.83,8.23 34.14,24.54 34.14,28.88 35.51,30.25 35.51,30.48 U$2.GPIO33
TXD
  Bottom 0.254: PIN_R.5 67.13,38.1 65.53,36.5 64.01,36.5 62.71,37.8 61.04,37.8 U$2.RX

## Text on the board
tPlace: 5V | 5V | GND | GND | GND | GND | GND | 3V3 | GND | GND | GND | SCL | SDA | GND | 3V3 | 5V | 5V | GND | GND | 5V | servo2 | GND | 5V | servo1 | LF | RF | RB | LB